# Altium PCB 幻彩灯带.PcbDoc
Units mil, origin at the board's own origin, x right, y up, seen from the top; angles counter-clockwise.
Board outline 3553.37 x 3553.34 mil, 2 copper layers (Top Layer, Bottom Layer); 66 components, 70 nets, 261 pads, 24 vias.
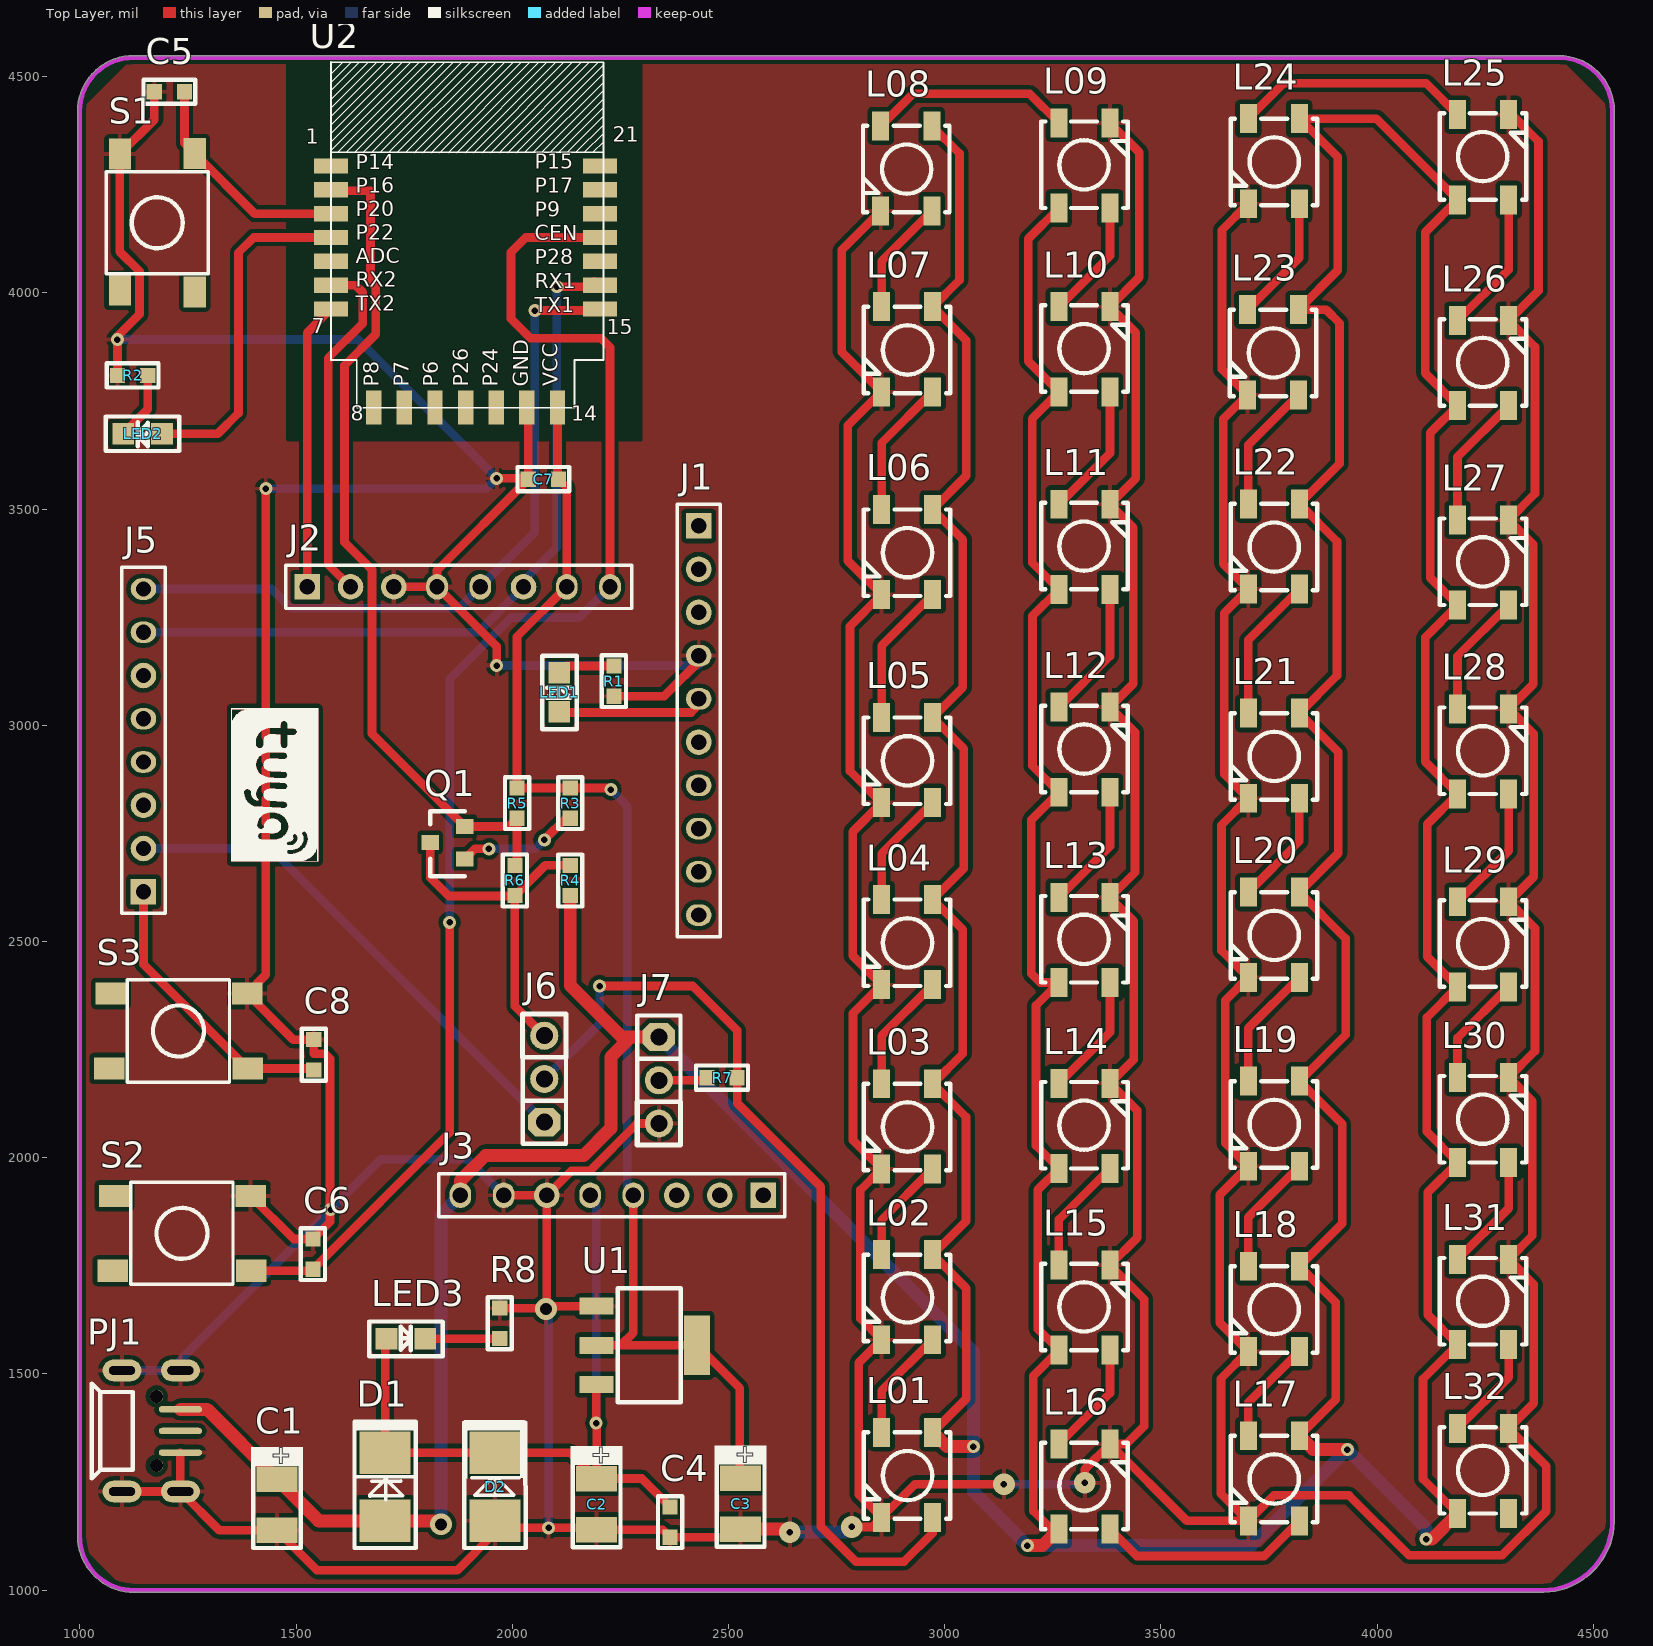
[diagram p0: Top Layer view]
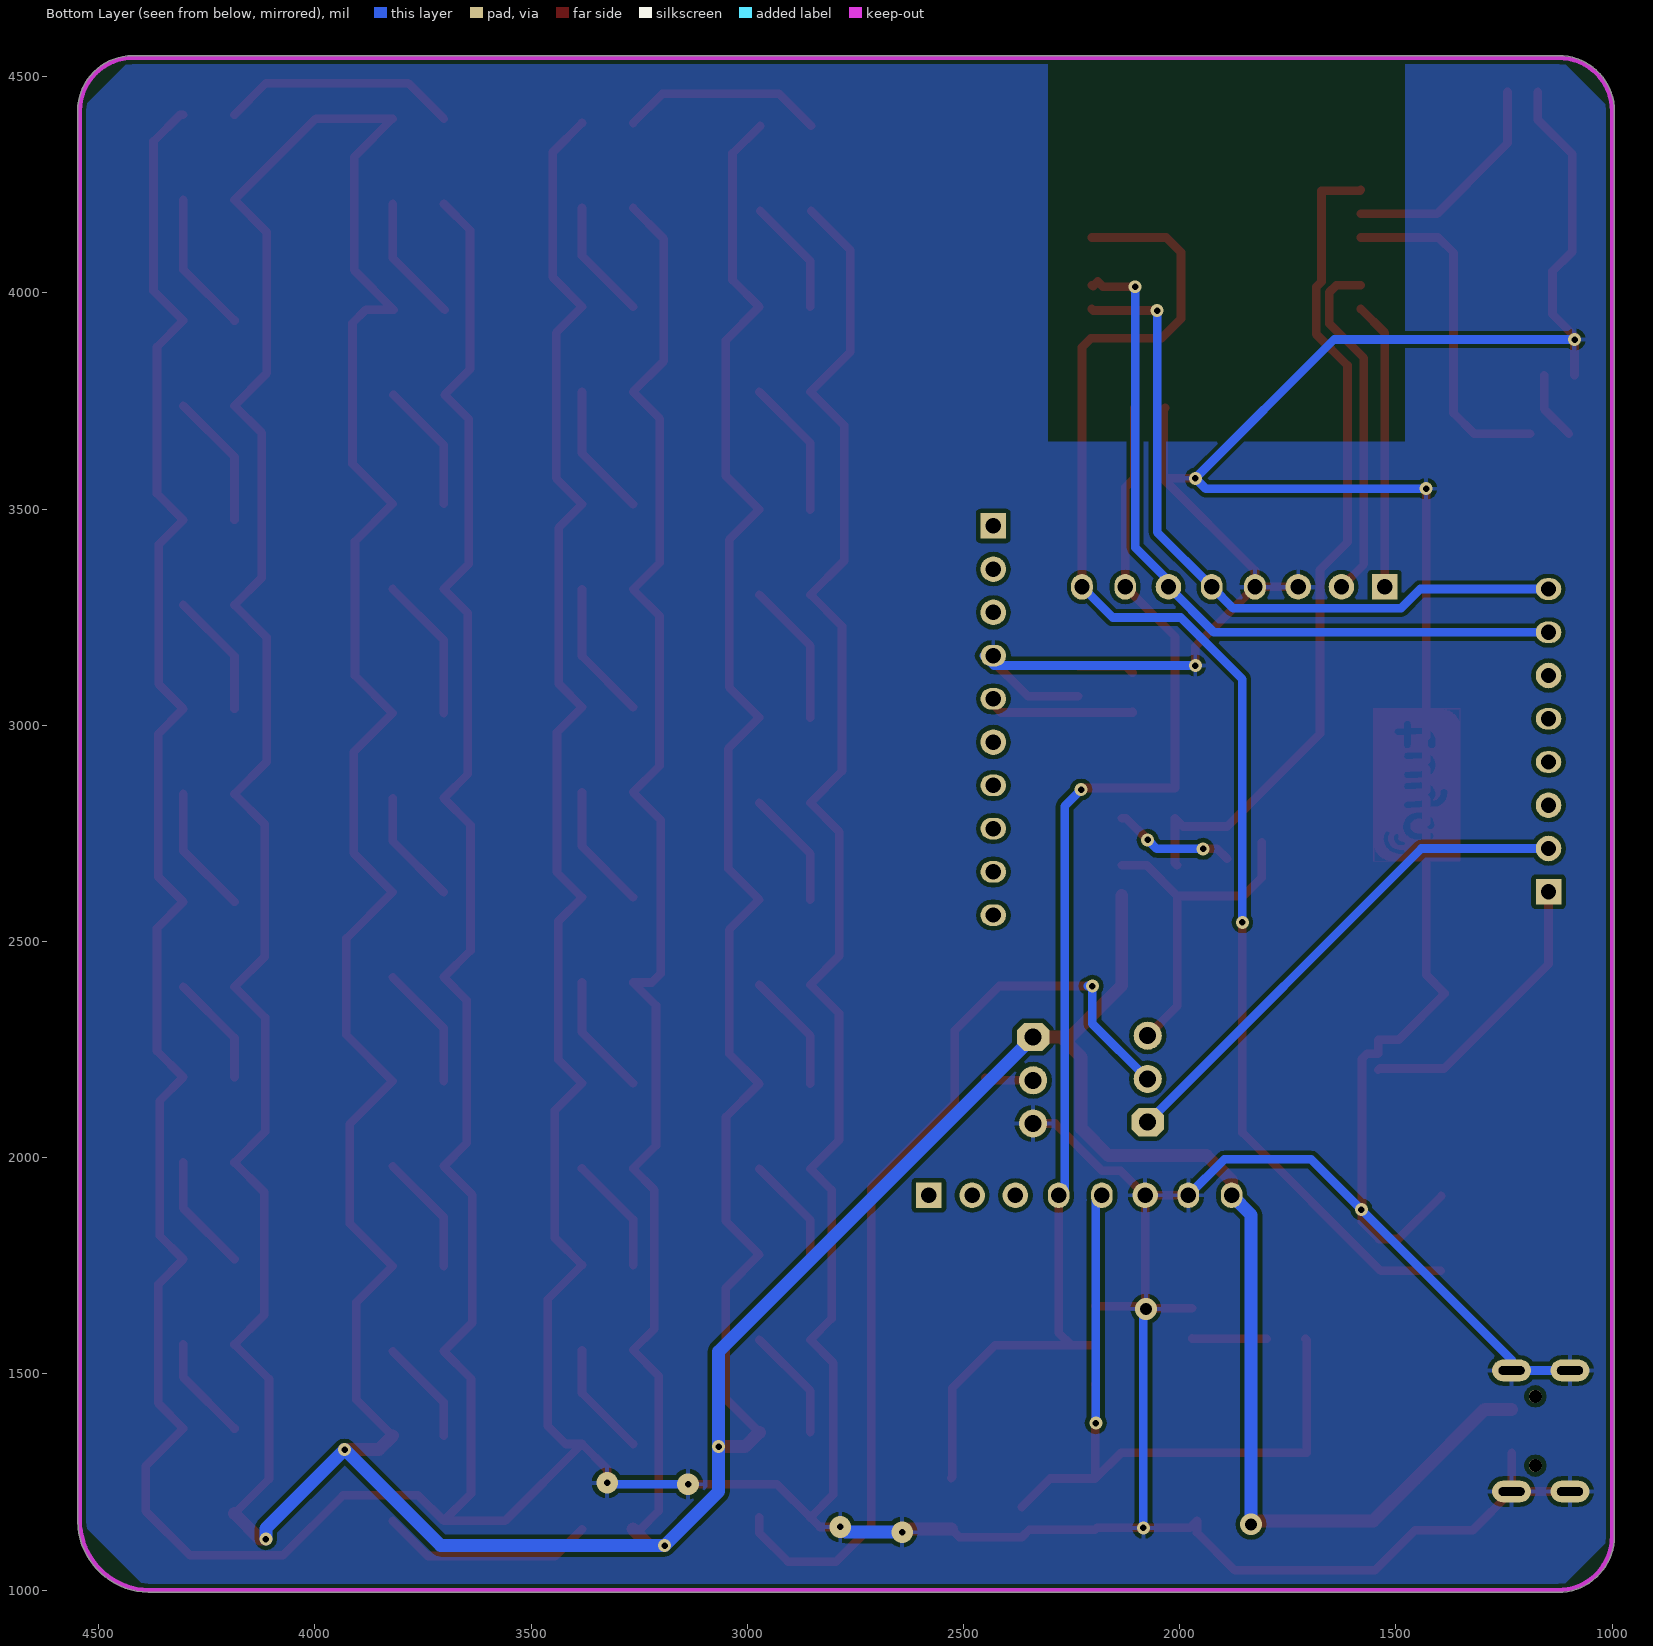
[diagram p1: Bottom Layer view, seen from below]

## Layer stack, top to bottom
Top Solder: solder mask 0.4, Solder Resist, Dk 3.5
Top Layer: signal copper 1.4
Dielectric 1: dielectric 12.6, FR-4, Dk 4.8
Bottom Layer: signal copper 1.4
Bottom Solder: solder mask 0.4, Solder Resist, Dk 3.5

## Board outline
1125,994.99 4384.97,994.99 ccw(c4385,1000) 4385.1,994.99 ccw(c4381.65,1161.65) 4548.32,1158.2 ccw(c4381.65,1161.65) 4548.36,1161.65 ccw(c4381.65,1161.65) 4548.32,1165.05 ccw(c4381.65,1161.65) 4548.32,1165.1 4548.32,1165.05 4548.32,4421.69 ccw(c4543.31,4421.69) 4548.32,4421.73 ccw(c4420.85,4420.85) 4421.73,4548.32 ccw(c4420.85,4420.85) 4419.99,4548.32 1123.31,4548.32 ccw(c1123.31,4420) 994.99,4420 994.99,1125 994.98,1125 cw(c1000,1125) 994.99,1125.03 994.98,1125 ccw(c1125,1125)

## Design rules (kind name [scope] priority, off if disabled: settings)
Clearance [All] p1: gap=10 ignorepadtopadclearanceinfootprint=FALSE except(0: Arc-Hole Track-Hole SMDPad-Hole THPad-Hole Via-Hole Fill-Hole Poly-Hole Region-Hole Text-Hole)
PolygonConnect [All] p1: connectstyle=Relief reliefconductorwidth=10 reliefentries=4 polygonreliefangle="90 Angle" airgapwidth=10
RoutingVias [All] p1: holewidth=28 width=50 viastyle="Through Hole" minholewidth=28 minwidth=50 maxholewidth=28 maxwidth=50
SolderMaskExpansion [All] p1: expansion=4
Width [InNet('WRX')] p1: maxlimit=30 minlimit=10 preferedwidth=20
30 further rules are at their usual default settings.

## Components (designator, comment, footprint, x,y, rotation, side; value= is the part's Value field where it differs from the comment)
C1 "220uF±20%/16V" 钽电容B3528 1456,1197.27 r270 top
C2 "22uF±20%/16V" 钽电容B3528 2195,1199 r270 top
C3 "22uF±20%/16V" 钽电容B3528 2528,1200 r270 top
C4 "0.1uF±20%/50V" C0603 2365,1192.27 r270 top
C5 "0.1uF±20%/16V" C0603 1172,4465 r0 top
C6 "0.1uF±20%/16V" C0603 1539,1742 r90 top
C7 "0.1uF±20%/16V" C0603 2037,3569 r0 top
C8 "0.1uF±20%/16V" C0603 1541,2273 r270 top
D1 "SS210" SMA(DO-214AC) 1706,1239 r90 top
D2 "SMBJ05CA" SMB(DO-214AA) 1960,1239 r90 top
J1 "CON10" HDR1X10Z 2431,3461 r270 top
J2 "CON8" HDR1X8Z 1526,3320 r0 top
J3 "CON8" HDR1X8Z 2580,1913 r180 top
J5 "CON8" HDR1X8Z 1147,2615 r90 top
J6 "KF301-3P" "SIP3 - 2.54" 2074,2082 r90 top
J7 "KF301-3P" "SIP3 - 2.54" 2339,2279 r270 top
L01 "WS2812E" WS2812E 2854,1364.85 r270 top
L02 "WS2812E" WS2812E 2854,1775.85 r270 top
L03 "WS2812E" WS2812E 2854,2171 r270 top
L04 "WS2812E" WS2812E 2854,2596.85 r270 top
L05 "WS2812E" WS2812E 2854,3017.85 r270 top
L06 "WS2812E" WS2812E 2854,3499 r270 top
L07 "WS2812E" WS2812E 2854,3967.85 r270 top
L08 "WS2812E" WS2812E 2851.89,4386 r270 top
L09 "WS2812E" WS2812E 3382.11,4196 r90 top
L10 "WS2812E" WS2812E 3382.11,3771 r90 top
L11 "WS2812E" WS2812E 3382.11,3314.15 r90 top
L12 "WS2812E" WS2812E 3382.11,2845 r90 top
L13 "WS2812E" WS2812E 3382.11,2405 r90 top
L14 "WS2812E" WS2812E 3382.11,1975.15 r90 top
L15 "WS2812E" WS2812E 3382.11,1555 r90 top
L16 "WS2812E" WS2812E 3382.11,1141 r90 top
L17 "WS2812E" WS2812E 3702,1357 r270 top
L18 "WS2812E" WS2812E 3702,1749 r270 top
L19 "WS2812E" WS2812E 3702,2177 r270 top
L20 "WS2812E" WS2812E 3702,2614 r270 top
L21 "WS2812E" WS2812E 3702,3028 r270 top
L22 "WS2812E" WS2812E 3702,3512 r270 top
L23 "WS2812E" WS2812E 3699.89,3961 r270 top
L24 "WS2812E" WS2812E 3702,4402.85 r270 top
L25 "WS2812E" WS2812E 4304,4215 r90 top
L26 "WS2812E" WS2812E 4304,3739 r90 top
L27 "WS2812E" WS2812E 4304,3278 r90 top
L28 "WS2812E" WS2812E 4304,2841 r90 top
L29 "WS2812E" WS2812E 4304,2395 r90 top
L30 "WS2812E" WS2812E 4304,1989 r90 top
L31 "WS2812E" WS2812E 4304,1568 r90 top
L32 "WS2812E" WS2812E 4304,1177 r90 top
LED1 "LED" LED0805_1 2109,3031 r90 top
LED2 "LED" LED0805_1 1190,3674 r180 top
LED3 "LED" LED0805_1 1709,1581 r0 top
PJ1 "MCR_USB" MICRO_USB-NEW-16.12.12 1165,1368 r90 top
Q1 "S8050" SOT-23-NPN 1890,2691 r90 top
R1 "1K±5%" R0603 2235,3067 r90 top
R2 "1K±5%" R0603 1157,3809 r180 top
R3 "2K±5%" R0603 2134,2855 r270 top
R4 "2K±5%" R0603 2134,2606 r90 top
R5 "2K±5%" R0603 2011,2855 r270 top
R6 "NC/0R" R0603 2006,2676 r270 top
R7 "1R±5%" R0603 2520,2185 r180 top
R8 "1R±5%" R0603 1971,1582 r90 top
S1 "KEY_SW2" KEY4-SMD 1179,4162 r270 top
S2 "KEY_SW2" KEY4-SMD 1236,1825 r180 top
S3 "KEY_SW2" KEY4-SMD 1228,2293 r180 top
U1 "GM1117-3.3ST3T" SOT-223 2311,1566 r270 top
U2 "WIFI_BLE_CBU" WIFI_BLE_CBU 1891.98,3734.3 r0 top

## Footprints (in the part's own frame and the unit in brackets; to place one, negate y for a bottom-side part, rotate by r counter-clockwise, add the part's x,y. Pads: shape width x height; smd on the part's side, far side on the other; paste and mask are expansions set on the pad)
C0603 [mil]
  rect 35x35 smd: 1(0,0) 2(70,0)
  silkscreen extent -25,-28 95,28, body extent 4,-16 66,15, height 12
HDR1X8Z [mm]
  rect 1.5x1.5 hole 0.9: 1(0,0)
  round 1.5 hole 0.9: 2(2.54,0) 3(5.08,0) 6(12.7,0)
  oval 1.27x1.5 hole 0.9: 4(7.62,0) 5(10.16,0) 7(15.24,0) 8(17.78,0)
  silkscreen extent -1.27,-1.27 19.05,1.27, body extent -1.27,-1.25 19.05,1.25, height 8.65
HDR1X10Z [mm]
  rect 1.5x1.5 hole 0.9: 1(0,0)
  round 1.5 hole 0.9: 2(2.54,0) 3(5.08,0) 6(12.7,0)
  oval 1.27x1.5 hole 0.9: 4(7.62,0) 5(10.16,0) 7(15.24,0) 8(17.78,0) 9(20.32,0) 10(22.86,0)
  silkscreen extent -1.27,-1.27 24.13,1.27, body extent -1.27,-1.25 24.13,1.25, height 8.65
KEY4-SMD [mm]
  rect 1.8x1.3 smd: 1(-4.035,-2.2) 2(-4.065,2.2) 3(4.065,2.2) 4(3.965,-2.2)
  silkscreen extent -3,-3 3,3
LED0805_1 [mil]
  rect 50x50 smd: 1(0,0) 2(90,0)
  silkscreen extent -40,-40 130,40, body extent 6,-25 84,24, height 30
MICRO_USB-NEW-16.12.12 [mil]
  oval 15x100 smd: 1(-50,-67.5) 3(0,-67.5) 5(50,-67.5)
  oval 0x100 smd: 2(-25,-67.5) 4(25,-67.5)
  oval 50x90 hole 20 slot 60 at 90 deg: 6(-140,-67.5) 7(-140,67.5) 8(140,67.5) 9(140,-67.5)
  round 30 hole 30 unplated: ""(-80,-12.5) ""(80,-12.5)
  silkscreen extent -110,42 110,138, body extent -145,-79 146,158, height 93
R0603 [mil]
  rect 35x35 smd: 1(0,0) 2(70,0)
  silkscreen extent -25,-28 95,28, body extent 2,-16 65,16, height 18
"SIP3 - 2.54" [mil]
  oct 65x75 hole 39.37: 1(0,0)
  round 65 hole 39.37: 2(100,0) 3(200,0)
  silkscreen extent -50,-50 250,50
SMA(DO-214AC) [mm]
  rect 2.5x3 smd: 1(-2,0) 2(2,0)
  silkscreen extent -3.6,-1.84 3.94,1.83, body extent -2.21,-1.38 2.46,1.27, height 2.35
SMB(DO-214AA) [mm]
  rect 2.5x3 smd: 1(-2,0) 2(2,0)
  silkscreen extent -3.6,-1.8 3.91,1.82, body extent -2.28,-1.33 2.39,1.32, height 2.35
SOT-23-NPN [mil]
  rect 35x40 smd: 1(75,0) 2(0,0) 3(38,80)
  silkscreen extent -40,0 110,80, body extent -17,-17 97,80, height 39
SOT-223 [mm]
  rect 1x2 smd: 1(-2.3,-2.95) 2(0,-2.95) 3(2.3,-2.95)
  rect 3.5x1.5 smd: 2(0,2.95)
  silkscreen extent -3.35,-1.71 3.35,1.99, body extent -3.29,-3.55 3.21,3.41, height 1.65
WIFI_BLE_CBU [mm]
  rect 2x0.9 smd: 1(-7.9,14.2) 2(-7.9,12.8) 3(-7.9,11.4) 4(-7.9,10) 5(-7.9,8.6) 6(-7.9,7.2) 7(-7.9,5.8) 15(7.9,5.8) 16(7.9,7.2) 17(7.9,8.6) 18(7.9,10) 19(7.9,11.4) 20(7.9,12.8) 21(7.9,14.2)
  rect 0.9x2 smd: 8(-5.4,0) 9(-3.6,0) 10(-1.8,0) 11(0,0) 12(1.8,0) 13(3.6,0) 14(5.4,0)
  silkscreen extent -7.9,0 8.14,20.33
WS2812E [mm]
  rect 1.7x1 smd: 1(0,3) 2(0,0) 3(5,0) 4(5,3)
  silkscreen extent 0,-1.04 5.08,4.04
钽电容B3528 [mm]
  rect 1.5x2.4 smd: 1(-1.5,0) 2(1.5,0)
  silkscreen extent -3.4,-1.52 2.54,1.52

## Part data
C1 C2 C3: library part "CAPACITOR POL", "Capacitor"
C4 C5 C6 C7 C8: library part CAP, "Capacitor"
D1: library part Diode1, "Diode"
D2: library part "D Schottky", "Schottky Diode", MFR=Toshiba
J1 J2 J3 J5: "Connector"
J6 J7: library part CON3, "Connector"
Q1: library part NPN, "NPN Transistor"
R1 R2 R3 R4 R5 R6 R7 R8: library part RES5
U1: library part GM1117
U2: "Module"

## Via types
v1: diameter 30, hole 15, Top Layer to Bottom Layer, 18 vias
v2: diameter 50, hole 15, Top Layer to Bottom Layer, 4 vias
v3: diameter 50, hole 28, Top Layer to Bottom Layer, 2 vias

## Nets (pads, with @x,y where several pads share a name; then routed paths per layer and width w, separated by ;. In a path a pad name is that pad's centre, name@x,y a point inside that pad or via, vN(x,y) a via of type N, cw(c..) or ccw(c..) an arc to the next point about the centre after c; other vN are vias at no path point)
+3.3V: C3.1 C7.2 J2.7 J3.4 R3.1 R5.1 U1.2 U2.14 | length 3054
  Top Layer w20: U2.14 2104.57,3571.43 C7.2 2126,3550 J2.7 2011,3205 R5.1 R3.1 2224,2855 v1(2228,2851) ; U1.2@2194.86,1566 2251,1566 ; J3.4 2280,1595 2251,1566 ; C3.1 2526,1261.06 2526,1467.14 2427.14,1566 2251,1566
  Bottom Layer w20: v1(2228,2851) 2266,2813 2266,1927 J3.4
+5V: C1.1 D1.1 J3.8 J7.1 L01.1 L02.1 L03.1 L04.1 L05.1 L06.1 L07.1 L08.1 L09.1 L10.1 L11.1 L12.1 L13.1 L14.1 L15.1 L16.1 L17.1 L18.1 L19.1 L20.1 L21.1 L22.1 L23.1 L24.1 L25.1 L26.1 L27.1 L28.1 L29.1 L30.1 L31.1 L32.1 PJ1.5 R4.1 | length 20076.2
  Top Layer w20: v3@1826.74,1160.26 v3(1835,1152) ; L08.1 3034,4322 3034,4029.74 L07.1 3050,3889.96 3050,3576.89 L06.1 3042,3429.11 3042,3087.74 L05.1 3044,2945.96 3044,2668.74 L04.1 3042,2526.96 3042,2240.89 L03.1 3049,2094.11 3049,1852.74 L02.1 3050,1697.96 3050,1442.74 L01.1 ; L16.1 3247,1141 3205,1183 3205,1496 L15.1 3215,1604 3215,1926.15 L14.1 3211,2028.15 3211,2352 L13.1 3221,2405 3200,2426 3200,2781 L12.1 3203,2906 3203,3253.15 L11.1 3202,3376.15 3202,3709 L10.1 3193,3842 3193,4125 L09.1 ; L17.1 3904,1440.89 3904,1665.11 L18.1 3919,1847.89 3919,2078.11 L19.1 3927,2283.89 3927,2507.11 L20.1 3910,2703.89 3910,2938.11 L21.1 3907,3114.89 3907,3425.11 L22.1 3913,3604.89 3913,3930 3882,3961 L23.1 3909,4052 3909,4313.96 L24.1 3998.04,4402.85 L25.1 4111,4140.11 4111,3813.89 L26.1 4123,3676.11 4123,3340.89 L27.1 4111,3203.11 4111,2915.89 L28.1 4116,2771.11 4116,2464.89 L29.1 4115,2324.11 4115,2059.89 L30.1 4117,1920.11 4117,1636.89 L31.1 4106,1488.11 4106,1256.89 L32.1
  Top Layer w30: PJ1.5 1294.32,1418 C1.1 1552.06,1160.26 D1.1 v3@1826.74,1160.26 ; J3.8 1880,1947 1938,2005 2165,2005 2228,2068 2228,2233 2274,2279 ; R4.1 2134,2398 2253,2279 2274,2279 ; J7.1 2274,2279 ; L01.1 3004.96,1332 v1(3066,1332) ; v1(3191,1103) 3226,1103 L16.1 ; L17.1 3852.11,1325 v1(3931,1325) ; v1(4113,1118) 4126.89,1118 L32.1
  Bottom Layer w30: v3(1835,1152) 1835,1868 J3.8 ; J7.1 3066,1552 v1(3066,1332) 3066,1228 v1(3191,1103) 3709,1103 v1(3931,1325) 4113,1143 v1(4113,1118)
+5VF: C2.1 C4.1 D1.2 D2.2 J3.5 LED3.1 U1.3 | length 1726.6
  Top Layer w20: LED3.1 1706,1578 D1.2 D2.2 2135.32,1317.74 C2.1 ; U1.3@2195,1475.31 U1.3 2194,1474.59 v1(2194,1386) 2195,1385 C2.1 ; C4.1 2299.21,1258.06 C2.1
  Bottom Layer w20: J3.5 2194,1899 v1(2194,1386)
ADC: U2.5
GND: C1.2 C2.2 C3.2 C4.2 C5.1 C6.2 C7.1 C8.1 D2.1 J1.4 J2.3 J2.4 J3.6 J3.7 J7.3 L01.3 L02.3 L03.3 L04.3 L05.3 L06.3 L07.3 L08.3 L09.3 L10.3 L11.3 L12.3 L13.3 L14.3 L15.3 L16.3 L17.3 L18.3 L19.3 L20.3 L21.3 L22.3 L23.3 L24.3 L25.3 L26.3 L27.3 L28.3 L29.3 L30.3 L31.3 L32.3 PJ1.1 PJ1.6 PJ1.7 PJ1.8 PJ1.9 R1.1 R2.2 R8.2 S1.1 S2.1 S3.1 U1.1 U2.13 | length 84195.4
  Top Layer w1: 1351,2685 1351,3039 ; 1352,2687 1352,3003 ; 1352,3038 1352,3039 ; 1353,2685 1353,3007 ; 1353,3037 1353,3039 ; 1354,2685 1354,3010 ; 1354,3037 1354,3039 ; 1355,2685 1355,3012 ; 1355,3037 1355,3039 ; 1356,2685 1356,3014 ; 1356,3037 1356,3039 ; 1357,2685 1357,3016 ; 1357,3037 1357,3039 ; 1358,2685 1358,3017 ; 1358,3037 1358,3039 ; 1359,2685 1359,3019 ; 1359,3037 1359,3039 ; 1360,2685 1360,3020 ; 1360,3037 1360,3039 ; 1361,2685 1361,3021 ; 1361,3037 1361,3039 ; 1362,2685 1362,3023 ; 1362,3037 1362,3039 ; 1363,2685 1363,3024 ; 1363,3037 1363,3039 ; 1364,2685 1364,3025 ; 1364,3037 1364,3039 ; 1365,2685 1365,3026 ; 1365,3037 1365,3039 ; 1366,2685 1366,3026 ; 1366,3037 1366,3039 ; 1367,2685 1367,3027 ; 1367,3037 1367,3039 ; 1368,2685 1368,3028 ; 1368,3037 1368,3039 ; 1369,2685 1369,3029 ; 1369,3037 1369,3039 ; 1370,2685 1370,3029 ; 1370,3037 1370,3039 ; 1371,2685 1371,3030 ; 1371,3037 1371,3039 ; 1372,2685 1372,3031 ; 1372,3037 1372,3039 ; 1373,2685 1373,3031 ; 1373,3037 1373,3039 ; 1374,2685 1374,3032 ; 1374,3037 1374,3039 ; 1375,2685 1375,3032 ; 1375,3037 1375,3039 ; 1376,2685 1376,3033 ; 1376,3037 1376,3039 ; 1377,2685 1377,3033 ; 1377,3037 1377,3039 ; 1378,2685 1378,3034 ; 1378,3037 1378,3039 ; 1379,2685 1379,3034 ; 1379,3037 1379,3039 ; 1380,2685 1380,2840 ; 1380,2848 1380,3034 ; 1380,3037 1380,3039 ; 1381,2685 1381,2835 ; 1381,2850 1381,3035 ; 1381,3037 1381,3039 ; 1382,2685 1382,2832 ; 1382,2851 1382,3035 ; 1382,3037 1382,3039 ; 1383,2685 1383,2830 ; 1383,2851 1383,3036 ; 1383,3037 1383,3039 ; 1384,2685 1384,2828 ; 1384,2852 1384,3036 ; 1384,3037 1384,3039 ; 1385,2685 1385,2826 ; 1385,2852 1385,3036 ; 1385,3037 1385,3039 ; 1386,2685 1386,2825 ; 1386,2853 1386,3036 ; 1386,3038 1386,3039 ; 1387,2685 1387,2823 ; 1387,2853 1387,3036 ; 1387,3038 1387,3039 ; 1388,2685 1388,2822 ; 1388,2853 1388,3037 ; 1388,3038 1388,3039 ; 1389,2685 1389,2821 ; 1389,2853 1389,3037 ; 1389,3038 1389,3039 ; 1390,2685 1390,2820 ; 1390,2853 1390,3037 ; 1390,3038 1390,3039 ; 1391,2685 1391,2819 ; 1391,2852 1391,3037 ; 1391,3038 1391,3039 ; 1392,2685 1392,2818 ; 1392,2852 1392,3039 ; 1393,2685 1393,2818 ; 1393,2852 1393,3039 ; 1394,2685 1394,2817 ; 1394,2851 1394,3039 ; 1395,2685 1395,2816 ; 1395,2850 1395,3039 ; 1396,2685 1396,2815 ; 1396,2849 1396,3039 ; 1397,2685 1397,2815 ; 1397,2847 1397,3039 ; 1398,2685 1398,2814 ; 1398,2839 1398,3039 ; 1399,2685 1399,2814 ; 1399,2836 1399,3039 ; 1400,2685 1400,2814 ; 1400,2834 1400,3039 ; 1401,2685 1401,2813 ; 1401,2833 1401,3039 ; 1402,2685 1402,2813 ; 1402,2831 1402,3039 ; 1403,2685 1403,2812 ; 1403,2830 1403,3039 ; 1404,2685 1404,2812 ; 1404,2830 1404,3039 ; 1405,2685 1405,2812 ; 1405,2829 1405,3039 ; 1406,2685 1406,2812 ; 1406,2828 1406,3039 ; 1407,2685 1407,2811 ; 1407,2828 1407,3039 ; 1408,2685 1408,2811 ; 1408,2828 1408,2837 ; 1408,2845 1408,2904 ; 1408,2913 1408,2951 ; 1408,2970 1408,3039 ; 1409,2685 1409,2811 ; 1409,2827 1409,2833 ; 1409,2849 1409,2899 ; 1409,2918 1409,2950 ; 1409,2973 1409,3039 ; 1410,2685 1410,2767 ; 1410,2771 1410,2811 ; 1410,2827 1410,2831 ; 1410,2852 1410,2897 ; 1410,2921 1410,2949 ; 1410,2976 1410,3039 ; 1411,2685 1411,2764 ; 1411,2776 1411,2811 ; 1411,2827 1411,2830 ; 1411,2853 1411,2895 ; 1411,2923 1411,2948 ; 1411,2977 1411,3039 ; 1412,2685 1412,2741 ; 1412,2746 1412,2763 ; 1412,2779 1412,2811 ; 1412,2827 1412,2829 ; 1412,2855 1412,2893 ; 1412,2924 1412,2947 ; 1412,2979 1412,3039 ; 1413,2685 1413,2739 ; 1413,2748 1413,2762 ; 1413,2781 1413,2811 ; 1413,2857 1413,2891 ; 1413,2926 1413,2947 ; 1413,2981 1413,3039 ; 1414,2685 1414,2738 ; 1414,2749 1414,2761 ; 1414,2783 1414,2811 ; 1414,2858 1414,2890 ; 1414,2927 1414,2947 ; 1414,2982 1414,3039 ; 1415,2685 1415,2737 ; 1415,2750 1415,2761 ; 1415,2785 1415,2811 ; 1415,2859 1415,2889 ; 1415,2928 1415,2947 ; 1415,2983 1415,3039 ; 1416,2685 1416,2736 ; 1416,2750 1416,2761 ; 1416,2786 1416,2811 ; 1416,2860 1416,2888 ; 1416,2929 1416,2947 ; 1416,2984 1416,3039 ; 1417,2685 1417,2736 ; 1417,2751 1417,2760 ; 1417,2787 1417,2811 ; 1417,2860 1417,2887 ; 1417,2930 1417,2947 ; 1417,2985 1417,3039 ; 1418,2685 1418,2736 ; 1418,2751 1418,2760 ; 1418,2788 1418,2811 ; 1418,2861 1418,2887 ; 1418,2931 1418,2947 ; 1418,2986 1418,3039 ; 1419,2685 1419,2735 ; 1419,2751 1419,2760 ; 1419,2790 1419,2811 ; 1419,2862 1419,2886 ; 1419,2931 1419,2947 ; 1419,2987 1419,3039 ; 1420,2685 1420,2735 ; 1420,2751 1420,2760 ; 1420,2790 1420,2811 ; 1420,2863 1420,2885 ; 1420,2932 1420,2947 ; 1420,2987 1420,3039 ; 1421,2685 1421,2735 ; 1421,2751 1421,2760 ; 1421,2791 1421,2811 ; 1421,2863 1421,2884 ; 1421,2933 1421,2947 ; 1421,2988 1421,3039 ; 1422,2685 1422,2735 ; 1422,2751 1422,2760 ; 1422,2792 1422,2811 ; 1422,2864 1422,2884 ; 1422,2933 1422,2948 ; 1422,2989 1422,3039 ; 1423,2685 1423,2735 ; 1423,2751 1423,2761 ; 1423,2793 1423,2811 ; 1423,2864 1423,2884 ; 1423,2934 1423,2949 ; 1423,2989 1423,3039 ; 1424,2685 1424,2735 ; 1424,2751 1424,2761 ; 1424,2794 1424,2810 ; 1424,2865 1424,2883 ; 1424,2934 1424,2950 ; 1424,2990 1424,3039 ; 1425,2685 1425,2735 ; 1425,2751 1425,2762 ; 1425,2794 1425,2810 ; 1425,2865 1425,2883 ; 1425,2935 1425,2953 ; 1425,2990 1425,3039 ; 1426,2685 1426,2735 ; 1426,2751 1426,2763 ; 1426,2795 1426,2810 ; 1426,2836 1426,2843 ; 1426,2866 1426,2882 ; 1426,2905 1426,2912 ; 1426,2935 1426,2968 ; 1426,2991 1426,3039 ; 1427,2685 1427,2735 ; 1427,2751 1427,2765 ; 1427,2795 1427,2810 ; 1427,2834 1427,2846 ; 1427,2866 1427,2882 ; 1427,2903 1427,2915 ; 1427,2935 1427,2970 ; 1427,2991 1427,3039 ; 1428,2685 1428,2735 ; 1428,2751 1428,2771 ; 1428,2796 1428,2810 ; 1428,2832 1428,2847 ; 1428,2866 1428,2881 ; 1428,2901 1428,2916 ; 1428,2936 1428,2972 ; 1428,2992 1428,3039 ; 1429,2685 1429,2735 ; 1429,2751 1429,2774 ; 1429,2796 1429,2810 ; 1429,2831 1429,2848 ; 1429,2867 1429,2881 ; 1429,2900 1429,2917 ; 1429,2936 1429,2973 ; 1429,2992 1429,3039 ; 1430,2685 1430,2735 ; 1430,2751 1430,2775 ; 1430,2797 1430,2810 ; 1430,2830 1430,2849 ; 1430,2867 1430,2881 ; 1430,2899 1430,2918 ; 1430,2936 1430,2974 ; 1430,2992 1430,3039 ; 1431,2685 1431,2735 ; 1431,2751 1431,2777 ; 1431,2797 1431,2810 ; 1431,2829 1431,2850 ; 1431,2867 1431,2881 ; 1431,2898 1431,2919 ; 1431,2936 1431,2975 ; 1431,2993 1431,3039 ; 1432,2685 1432,2735 ; 1432,2751 1432,2778 ; 1432,2797 1432,2810 ; 1432,2829 1432,2851 ; 1432,2867 1432,2880 ; 1432,2898 1432,2920 ; 1432,2937 1432,2975 ; 1432,2993 1432,3039 ; 1433,2685 1433,2735 ; 1433,2751 1433,2779 ; 1433,2798 1433,2810 ; 1433,2828 1433,2851 ; 1433,2868 1433,2880 ; 1433,2897 1433,2920 ; 1433,2937 1433,2976 ; 1433,2993 1433,3039 ; 1434,2685 1434,2735 ; 1434,2751 1434,2780 ; 1434,2798 1434,2810 ; 1434,2827 1434,2851 ; 1434,2868 1434,2880 ; 1434,2896 1434,2920 ; 1434,2937 1434,2977 ; 1434,2993 1434,3039 ; 1435,2685 1435,2735 ; 1435,2751 1435,2781 ; 1435,2798 1435,2810 ; 1435,2827 1435,2852 ; 1435,2868 1435,2880 ; 1435,2896 1435,2921 ; 1435,2937 1435,2977 ; 1435,2994 1435,3039 ; 1436,2685 1436,2735 ; 1436,2751 1436,2781 ; 1436,2798 1436,2810 ; 1436,2827 1436,2852 ; 1436,2868 1436,2879 ; 1436,2896 1436,2921 ; 1436,2937 1436,2977 ; 1436,2994 1436,3039 ; 1437,2685 1437,2735 ; 1437,2751 1437,2782 ; 1437,2799 1437,2810 ; 1437,2826 1437,2852 ; 1437,2868 1437,2879 ; 1437,2895 1437,2921 ; 1437,2937 1437,2978 ; 1437,2994 1437,3039 ; 1438,2685 1438,2735 ; 1438,2751 1438,2782 ; 1438,2799 1438,2810 ; 1438,2826 1438,2852 ; 1438,2868 1438,2879 ; 1438,2895 1438,2921 ; 1438,2937 1438,2978 ; 1438,2994 1438,3039 ; 1439,2685 1439,2735 ; 1439,2751 1439,2783 ; 1439,2799 1439,2810 ; 1439,2826 1439,2853 ; 1439,2868 1439,2879 ; 1439,2895 1439,2922 ; 1439,2938 1439,2978 ; 1439,2994 1439,3039 ; 1440,2685 1440,2735 ; 1440,2750 1440,2783 ; 1440,2799 1440,2810 ; 1440,2826 1440,2853 ; 1440,2868 1440,2879 ; 1440,2895 1440,2922 ; 1440,2938 1440,2979 ; 1440,2994 1440,3039 ; 1441,2685 1441,2735 ; 1441,2750 1441,2783 ; 1441,2799 1441,2810 ; 1441,2825 1441,2853 ; 1441,2869 1441,2879 ; 1441,2895 1441,2922 ; 1441,2938 1441,2979 ; 1441,2994 1441,3039 ; 1442,2685 1442,2735 ; 1442,2750 1442,2783 ; 1442,2799 1442,2810 ; 1442,2825 1442,2853 ; 1442,2869 1442,2879 ; 1442,2894 1442,2922 ; 1442,2938 1442,2979 ; 1442,2994 1442,3039 ; 1443,2685 1443,2735 ; 1443,2750 1443,2784 ; 1443,2799 1443,2810 ; 1443,2825 1443,2853 ; 1443,2869 1443,2879 ; 1443,2894 1443,2922 ; 1443,2938 1443,2979 ; 1443,2994 1443,3039 ; 1444,2685 1444,2735 ; 1444,2750 1444,2784 ; 1444,2799 1444,2810 ; 1444,2825 1444,2853 ; 1444,2868 1444,2879 ; 1444,2894 1444,2922 ; 1444,2938 1444,2979 ; 1444,2994 1444,3039 ; 1445,2685 1445,2735 ; 1445,2750 1445,2784 ; 1445,2799 1445,2809 ; 1445,2825 1445,2853 ; 1445,2868 1445,2879 ; 1445,2894 1445,2922 ; 1445,2938 1445,2979 ; 1445,2994 1445,3039 ; 1446,2685 1446,2735 ; 1446,2750 1446,2784 ; 1446,2799 1446,2809 ; 1446,2825 1446,2853 ; 1446,2868 1446,2879 ; 1446,2894 1446,2922 ; 1446,2938 1446,2979 ; 1446,2994 1446,3039 ; 1447,2685 1447,2735 ; 1447,2750 1447,2784 ; 1447,2799 1447,2809 ; 1447,2825 1447,2853 ; 1447,2868 1447,2879 ; 1447,2894 1447,2922 ; 1447,2938 1447,2979 ; 1447,2994 1447,3039 ; 1448,2685 1448,2735 ; 1448,2750 1448,2784 ; 1448,2799 1448,2809 ; 1448,2825 1448,2853 ; 1448,2868 1448,2879 ; 1448,2894 1448,2922 ; 1448,2937 1448,2979 ; 1448,2994 1448,3039 ; 1449,2685 1449,2735 ; 1449,2750 1449,2784 ; 1449,2799 1449,2809 ; 1449,2825 1449,2853 ; 1449,2868 1449,2878 ; 1449,2894 1449,2922 ; 1449,2937 1449,2979 ; 1449,2994 1449,3039 ; 1450,2685 1450,2735 ; 1450,2750 1450,2783 ; 1450,2799 1450,2809 ; 1450,2825 1450,2853 ; 1450,2868 1450,2878 ; 1450,2894 1450,2922 ; 1450,2937 1450,2979 ; 1450,2994 1450,3039 ; 1451,2685 1451,2735 ; 1451,2751 1451,2783 ; 1451,2799 1451,2809 ; 1451,2825 1451,2853 ; 1451,2868 1451,2878 ; 1451,2894 1451,2922 ; 1451,2937 1451,2979 ; 1451,2994 1451,3039 ; 1452,2685 1452,2735 ; 1452,2751 1452,2783 ; 1452,2799 1452,2809 ; 1452,2825 1452,2853 ; 1452,2868 1452,2878 ; 1452,2894 1452,2922 ; 1452,2937 1452,2979 ; 1452,2994 1452,3039 ; 1453,2685 1453,2735 ; 1453,2751 1453,2783 ; 1453,2799 1453,2809 ; 1453,2825 1453,2852 ; 1453,2868 1453,2878 ; 1453,2894 1453,2922 ; 1453,2937 1453,2978 ; 1453,2994 1453,3039 ; 1454,2685 1454,2735 ; 1454,2751 1454,2782 ; 1454,2798 1454,2809 ; 1454,2825 1454,2852 ; 1454,2868 1454,2878 ; 1454,2894 1454,2922 ; 1454,2937 1454,2978 ; 1454,2994 1454,3039 ; 1455,2685 1455,2735 ; 1455,2752 1455,2782 ; 1455,2798 1455,2809 ; 1455,2825 1455,2852 ; 1455,2868 1455,2878 ; 1455,2894 1455,2922 ; 1455,2937 1455,2978 ; 1455,2994 1455,3039 ; 1456,2685 1456,2735 ; 1456,2752 1456,2781 ; 1456,2798 1456,2809 ; 1456,2825 1456,2852 ; 1456,2868 1456,2878 ; 1456,2894 1456,2922 ; 1456,2937 1456,2978 ; 1456,2994 1456,3039 ; 1457,2685 1457,2735 ; 1457,2753 1457,2781 ; 1457,2798 1457,2809 ; 1457,2824 1457,2852 ; 1457,2868 1457,2878 ; 1457,2894 1457,2922 ; 1457,2937 1457,2978 ; 1457,2994 1457,3039 ; 1458,2685 1458,2736 ; 1458,2753 1458,2780 ; 1458,2797 1458,2809 ; 1458,2824 1458,2852 ; 1458,2868 1458,2878 ; 1458,2894 1458,2922 ; 1458,2937 1458,2978 ; 1458,2994 1458,3039 ; 1459,2685 1459,2736 ; 1459,2754 1459,2779 ; 1459,2797 1459,2809 ; 1459,2824 1459,2852 ; 1459,2868 1459,2878 ; 1459,2894 1459,2922 ; 1459,2937 1459,2978 ; 1459,2994 1459,3039 ; 1460,2685 1460,2736 ; 1460,2755 1460,2778 ; 1460,2797 1460,2809 ; 1460,2824 1460,2852 ; 1460,2868 1460,2878 ; 1460,2894 1460,2921 ; 1460,2937 1460,2978 ; 1460,2994 1460,3039 ; 1461,2685 1461,2737 ; 1461,2756 1461,2777 ; 1461,2796 1461,2809 ; 1461,2824 1461,2852 ; 1461,2868 1461,2878 ; 1461,2894 1461,2921 ; 1461,2937 1461,2978 ; 1461,2994 1461,3039 ; 1462,2685 1462,2737 ; 1462,2757 1462,2776 ; 1462,2796 1462,2809 ; 1462,2824 1462,2852 ; 1462,2868 1462,2878 ; 1462,2894 1462,2921 ; 1462,2937 1462,2978 ; 1462,2994 1462,3039 ; 1463,2685 1463,2737 ; 1463,2758 1463,2775 ; 1463,2795 1463,2809 ; 1463,2824 1463,2852 ; 1463,2868 1463,2878 ; 1463,2894 1463,2921 ; 1463,2937 1463,2978 ; 1463,2994 1463,3039 ; 1464,2685 1464,2738 ; 1464,2760 1464,2773 ; 1464,2795 1464,2809 ; 1464,2824 1464,2852 ; 1464,2867 1464,2878 ; 1464,2894 1464,2921 ; 1464,2937 1464,2955 ; 1464,3002 1464,3039 ; 1465,2685 1465,2738 ; 1465,2762 1465,2770 ; 1465,2794 1465,2808 ; 1465,2824 1465,2852 ; 1465,2867 1465,2878 ; 1465,2894 1465,2921 ; 1465,2937 1465,2951 ; 1465,3006 1465,3039 ; 1466,2685 1466,2739 ; 1466,2794 1466,2808 ; 1466,2824 1466,2852 ; 1466,2867 1466,2878 ; 1466,2894 1466,2921 ; 1466,2937 1466,2950 ; 1466,3007 1466,3039 ; 1467,2685 1467,2739 ; 1467,2793 1467,2808 ; 1467,2824 1467,2852 ; 1467,2867 1467,2878 ; 1467,2893 1467,2921 ; 1467,2937 1467,2949 ; 1467,3008 1467,3039 ; 1468,2685 1468,2740 ; 1468,2793 1468,2808 ; 1468,2824 1468,2852 ; 1468,2867 1468,2878 ; 1468,2893 1468,2921 ; 1468,2937 1468,2948 ; 1468,3009 1468,3039 ; 1469,2685 1469,2741 ; 1469,2792 1469,2808 ; 1469,2824 1469,2852 ; 1469,2867 1469,2878 ; 1469,2893 1469,2921 ; 1469,2937 1469,2947 ; 1469,3009 1469,3039 ; 1470,2685 1470,2741 ; 1470,2791 1470,2808 ; 1470,2824 1470,2852 ; 1470,2867 1470,2878 ; 1470,2893 1470,2921 ; 1470,2937 1470,2947 ; 1470,3010 1470,3039 ; 1471,2685 1471,2742 ; 1471,2790 1471,2808 ; 1471,2824 1471,2852 ; 1471,2867 1471,2878 ; 1471,2893 1471,2921 ; 1471,2937 1471,2947 ; 1471,3010 1471,3039 ; 1472,2685 1472,2743 ; 1472,2790 1472,2808 ; 1472,2824 1472,2851 ; 1472,2867 1472,2878 ; 1472,2893 1472,2921 ; 1472,2937 1472,2947 ; 1472,3010 1472,3039 ; 1473,2685 1473,2744 ; 1473,2789 1473,2808 ; 1473,2824 1473,2851 ; 1473,2867 1473,2878 ; 1473,2893 1473,2921 ; 1473,2937 1473,2947 ; 1473,3010 1473,3039 ; 1474,2685 1474,2745 ; 1474,2788 1474,2808 ; 1474,2823 1474,2852 ; 1474,2867 1474,2878 ; 1474,2893 1474,2921 ; 1474,2937 1474,2947 ; 1474,3010 1474,3039 ; 1475,2685 1475,2745 ; 1475,2787 1475,2808 ; 1475,2823 1475,2852 ; 1475,2867 1475,2878 ; 1475,2893 1475,2921 ; 1475,2936 1475,2947 ; 1475,3010 1475,3039 ; 1476,2685 1476,2747 ; 1476,2785 1476,2809 ; 1476,2823 1476,2852 ; 1476,2866 1476,2878 ; 1476,2893 1476,2922 ; 1476,2936 1476,2947 ; 1476,3009 1476,3039 ; 1477,2685 1477,2748 ; 1477,2784 1477,2809 ; 1477,2822 1477,2852 ; 1477,2866 1477,2879 ; 1477,2892 1477,2922 ; 1477,2936 1477,2947 ; 1477,3009 1477,3039 ; 1478,2685 1478,2726 ; 1478,2728 1478,2749 ; 1478,2783 1478,2810 ; 1478,2822 1478,2853 ; 1478,2865 1478,2879 ; 1478,2891 1478,2923 ; 1478,2935 1478,2948 ; 1478,3008 1478,3039 ; 1479,2685 1479,2705 ; 1479,2709 1479,2724 ; 1479,2730 1479,2751 ; 1479,2781 1479,2811 ; 1479,2821 1479,2854 ; 1479,2864 1479,2880 ; 1479,2890 1479,2924 ; 1479,2934 1479,2948 ; 1479,3008 1479,3039 ; 1480,2685 1480,2704 ; 1480,2711 1480,2723 ; 1480,2731 1480,2752 ; 1480,2779 1480,2812 ; 1480,2820 1480,2855 ; 1480,2863 1480,2881 ; 1480,2889 1480,2925 ; 1480,2933 1480,2949 ; 1480,3007 1480,3039 ; 1481,2685 1481,2703 ; 1481,2712 1481,2722 ; 1481,2731 1481,2754 ; 1481,2777 1481,2814 ; 1481,2817 1481,2857 ; 1481,2860 1481,2884 ; 1481,2887 1481,2927 ; 1481,2930 1481,2951 ; 1481,3005 1481,3039 ; 1482,2685 1482,2703 ; 1482,2712 1482,2722 ; 1482,2731 1482,2757 ; 1482,2774 1482,2977 ; 1482,2993 1482,3039 ; 1483,2685 1483,2702 ; 1483,2712 1483,2722 ; 1483,2732 1483,2761 ; 1483,2770 1483,2977 ; 1483,2993 1483,3039 ; 1484,2685 1484,2702 ; 1484,2712 1484,2722 ; 1484,2732 1484,2977 ; 1484,2993 1484,3039 ; 1485,2685 1485,2702 ; 1485,2712 1485,2722 ; 1485,2732 1485,2977 ; 1485,2993 1485,3039 ; 1486,2685 1486,2702 ; 1486,2712 1486,2722 ; 1486,2732 1486,2977 ; 1486,2993 1486,3039 ; 1487,2685 1487,2702 ; 1487,2712 1487,2722 ; 1487,2732 1487,2977 ; 1487,2993 1487,3039 ; 1488,2685 1488,2702 ; 1488,2712 1488,2722 ; 1488,2732 1488,2977 ; 1488,2993 1488,3039 ; 1489,2685 1489,2702 ; 1489,2712 1489,2722 ; 1489,2733 1489,2977 ; 1489,2993 1489,3039 ; 1490,2685 1490,2702 ; 1490,2712 1490,2722 ; 1490,2733 1490,2977 ; 1490,2993 1490,3039 ; 1491,2685 1491,2702 ; 1491,2712 1491,2722 ; 1491,2734 1491,2977 ; 1491,2993 1491,3039 ; 1492,2685 1492,2702 ; 1492,2712 1492,2723 ; 1492,2735 1492,2743 ; 1492,2745 1492,2977 ; 1492,2993 1492,3039 ; 1493,2685 1493,2702 ; 1493,2713 1493,2723 ; 1493,2737 1493,2740 ; 1493,2747 1493,2977 ; 1493,2993 1493,3039 ; 1494,2685 1494,2702 ; 1494,2713 1494,2723 ; 1494,2748 1494,2977 ; 1494,2993 1494,3039 ; 1495,2685 1495,2703 ; 1495,2713 1495,2724 ; 1495,2748 1495,2977 ; 1495,2993 1495,3039 ; 1496,2685 1496,2703 ; 1496,2713 1496,2724 ; 1496,2749 1496,2977 ; 1496,2993 1496,3039 ; 1497,2685 1497,2703 ; 1497,2713 1497,2725 ; 1497,2749 1497,2977 ; 1497,2992 1497,3039 ; 1498,2685 1498,2703 ; 1498,2714 1498,2726 ; 1498,2749 1498,2978 ; 1498,2992 1498,3039 ; 1499,2685 1499,2703 ; 1499,2714 1499,2727 ; 1499,2749 1499,2978 ; 1499,2992 1499,3039 ; 1500,2685 1500,2704 ; 1500,2714 1500,2728 ; 1500,2748 1500,2979 ; 1500,2991 1500,3039 ; 1501,2685 1501,2704 ; 1501,2715 1501,2729 ; 1501,2748 1501,2980 ; 1501,2990 1501,3039 ; 1502,2685 1502,2704 ; 1502,2715 1502,2730 ; 1502,2747 1502,2981 ; 1502,2989 1502,3039 ; 1503,2685 1503,2705 ; 1503,2716 1503,2732 ; 1503,2746 1503,2983 ; 1503,2987 1503,3039 ; 1504,2685 1504,2705 ; 1504,2716 1504,2734 ; 1504,2743 1504,3039 ; 1505,2685 1505,2705 ; 1505,2717 1505,3039 ; 1506,2685 1506,2706 ; 1506,2718 1506,3039 ; 1507,2685 1507,2706 ; 1507,2718 1507,3039 ; 1508,2685 1508,2707 ; 1508,2719 1508,3039 ; 1509,2685 1509,2707 ; 1509,2720 1509,3039 ; 1510,2685 1510,2708 ; 1510,2721 1510,3039 ; 1511,2686 1511,2708 ; 1511,2722 1511,3039 ; 1512,2686 1512,2709 ; 1512,2723 1512,3039 ; 1513,2685 1513,2710 ; 1513,2725 1513,3039 ; 1514,2685 1514,2686 ; 1514,2687 1514,2710 ; 1514,2727 1514,2748 ; 1514,2752 1514,3039 ; 1515,2685 1515,2686 ; 1515,2687 1515,2711 ; 1515,2729 1515,2746 ; 1515,2753 1515,3039 ; 1516,2685 1516,2686 ; 1516,2687 1516,2712 ; 1516,2732 1516,2743 ; 1516,2754 1516,3039 ; 1517,2685 1517,2686 ; 1517,2687 1517,2713 ; 1517,2754 1517,3039 ; 1518,2685 1518,2686 ; 1518,2688 1518,2714 ; 1518,2755 1518,3039 ; 1519,2685 1519,2686 ; 1519,2688 1519,2715 ; 1519,2755 1519,3039 ; 1520,2685 1520,2686 ; 1520,2688 1520,2716 ; 1520,2755 1520,3039 ; 1521,2685 1521,2686 ; 1521,2688 1521,2717 ; 1521,2755 1521,3039 ; 1522,2685 1522,2686 ; 1522,2689 1522,2718 ; 1522,2754 1522,3039 ; 1523,2685 1523,2686 ; 1523,2689 1523,2720 ; 1523,2754 1523,3039 ; 1524,2685 1524,2686 ; 1524,2690 1524,2721 ; 1524,2753 1524,3039 ; 1525,2685 1525,2686 ; 1525,2690 1525,2723 ; 1525,2751 1525,3039 ; 1526,2685 1526,2686 ; 1526,2691 1526,2726 ; 1526,2749 1526,3039 ; 1527,2685 1527,2686 ; 1527,2691 1527,2729 ; 1527,2746 1527,3039 ; 1528,2685 1528,2686 ; 1528,2692 1528,2734 ; 1528,2740 1528,3039 ; 1529,2685 1529,2686 ; 1529,2692 1529,3039 ; 1530,2685 1530,2686 ; 1530,2693 1530,3039 ; 1531,2685 1531,2686 ; 1531,2693 1531,3039 ; 1532,2685 1532,2686 ; 1532,2694 1532,3039 ; 1533,2685 1533,2686 ; 1533,2695 1533,3039 ; 1534,2685 1534,2686 ; 1534,2695 1534,3039 ; 1535,2685 1535,2686 ; 1535,2696 1535,3039 ; 1536,2685 1536,2686 ; 1536,2697 1536,3039 ; 1537,2685 1537,2686 ; 1537,2698 1537,3039 ; 1538,2685 1538,2686 ; 1538,2699 1538,3039 ; 1539,2685 1539,2686 ; 1539,2700 1539,3039 ; 1540,2685 1540,2686 ; 1540,2701 1540,3039 ; 1541,2685 1541,2686 ; 1541,2702 1541,3039 ; 1542,2685 1542,2686 ; 1542,2704 1542,3039 ; 1543,2685 1543,2686 ; 1543,2705 1543,3039 ; 1544,2685 1544,2686 ; 1544,2706 1544,3039 ; 1545,2685 1545,2686 ; 1545,2708 1545,3039 ; 1546,2685 1546,2686 ; 1546,2710 1546,3039 ; 1547,2685 1547,2686 ; 1547,2712 1547,3039 ; 1548,2685 1548,2686 ; 1548,2715 1548,3037 ; 1548,3038 1548,3039 ; 1549,2685 1549,2686 ; 1549,2718 1549,3036 ; 1549,3038 1549,3039 ; 1550,2685 1550,2718 ; 1550,2721 1550,3039 ; 1551,2685 1551,3039
  Top Layer w20: R2.2 v1(1087,3892) 1087,3899.49 1137.98,3950.46 1137.98,4049.61 1092.39,4095.21 S1.1 1172,4400.47 C5.1 ; PJ1.7 PJ1.6 ; PJ1.1 PJ1.6 ; S2.1 1494.47,1812 C6.2 1578.5,1851.5 1578.5,2228.78 1566.78,2240.5 1541,2240.5 C8.1 1493.47,2273 S3.1 1430,2422.76 1430,2685 ; 1430,2735 1430,2751 ; 1430,2775 1430,2797 ; 1430,2810 1430,2830 ; 1430,2849 1430,2867 ; 1430,2881 1430,2899 ; 1430,2918 1430,2936 ; 1430,2974 1430,2992 ; 1430,3039 v1(1430,3547) ; J2.3 J2.4 ; v1(1964,3138) 1964,3182 J2.4 ; v1(1964,3571) 2035,3571 C7.1 ; R8.2 v3@2076,1652 ; J3.7 J3.6 ; U2.13 2037,3731.01 C7.1 ; U1.1 2084.55,1656.55 v3(2078,1650) v3@2076,1652 ; R1.1 2351,3067 J1.4@2445,3161 ; J7.3 2288.5,2079 2179.5,1970 2137,1970 J3.6 ; C3.2 2509.32,1122.27 C4.2 2347.32,1139.94 C2.2 2190.94,1144 v1(2084,1144) 1976.26,1144 D2.1 1960,1133 1873,1046 1548.21,1046 C1.2 1322.29,1138.21 PJ1.6 ; v2(2785,1146) 2832,1146 L01.3 ; L08.3 2762,4099.26 2762,3863 L07.3 2776,3693 2776,3380.15 L06.3 2781,3229.15 2781,2894 L05.3 2787,2754 2787,2467 L04.3 2788,2334 2788,2040.15 L03.3 2805,1925.15 2805,1628 L02.3 2801,1526 2801,1221 L01.3 ; v2(3137,1245) 2931,1245 L01.3 ; v2(3324,1248) 3324,1279.74 L16.3 ; L09.3 3450,4324.96 3450,4035.74 L10.3 3441.96,3908 3441.96,3570.85 L11.3 3436,3457.11 3436,3095.74 L12.3 3440,2983.96 3440,2659.74 L13.3 3437,2546.96 3437,2226.89 L14.3 3445,2109.11 3445,1814.74 L15.3 3461,1672.96 3461,1379 3419.85,1337.85 L16.3 ; L24.3 3641,4145 3641,3823.04 L23.3 3644,3708.26 3644,3373.15 L22.3 3646,3259.15 3646,2887.15 L21.3 3640,2769.15 3640,2479.15 L20.3 3649,2364.15 3649,2033.15 L19.3 3636,1914.15 3636,1618.15 L18.3 3639,1489.15 3639,1223.15 L17.3 ; L25.3 4311.15,4411.85 4373,4350 4373,4004.85 L26.3 4365,3874.85 4365,3535.85 L27.3 4361,3417.85 4361,3094.85 L28.3 4362,2979.85 4362,2649.85 L29.3 4365,2530.85 4365,2246.85 L30.3 4359,2130.85 4359,1819.85 L31.3 4362,1706.85 4362,1431.85 L32.3 4391,1286.85 4391,1182.57 4289.43,1081 4073,1081 3935,1219 3760.85,1219 L17.3 ; J2.4 1826,3358 C7.1 ; v3@2076,1652 2080,1656 J3.6 ; L16.3 3559.81,1160.15 L17.3
  Top Layer w30: C3.2 2635.06,1140.94 v2(2642,1134)
  Bottom Layer w20: v1(1087,3892) 1643,3892 v1(1964,3571) 1940,3547 v1(1430,3547) ; PJ1.8 PJ1.9 1232.5,1532.5 v1(1580,1880) 1696,1996 1897,1996 J3.7 ; v1(1964,3138) 2430,3138 J1.4@2453,3161 ; v3(2078,1650) 2084,1644 v1(2084,1144) ; v2(3137,1245) 3321,1245 v2(3324,1248)
  Bottom Layer w30: v2(2642,1134) 2773,1134 v2(2785,1146)
NetC8_2: C8.2 J5.1 S3.2 | length 662.8
  Top Layer w20: J5.1 1147,2447.43 S3.2 1537.61,2206.39 C8.2
NetJ1_5: J1.5 LED1.1 | length 350.5
  Top Layer w20: LED1.1 2109,3029.5 2413.5,3029.5 J1.5@2445,3061
NetJ7_2: J7.2 R7.2 | length 113.5
  Top Layer w20: J7.2 2444,2179 R7.2
NetL01_2: L01.2 L02.4 | length 263.1
  Top Layer w20: L01.2 2854,1460.89 L02.4
NetL02_2: L02.2 L03.4 | length 247.2
  Top Layer w20: L02.2 2854,1856.04 L03.4
NetL03_2: L03.2 L04.4 | length 277.9
  Top Layer w20: L03.2 2854,2281.89 L04.4
NetL04_2: L04.2 L05.4 | length 273.1
  Top Layer w20: L04.2 2854,2702.89 L05.4
NetL05_2: L05.2 L06.4 | length 333.2
  Top Layer w20: L05.2 2854,3184.04 L06.4
NetL06_2: L06.2 L07.4 | length 320.9
  Top Layer w20: L06.2 2854,3652.89 L07.4
NetL07_2: L07.2 L08.4 | length 269.3
  Top Layer w20: L07.2 2854,4073.15 L08.4
NetL08_2: L08.2 L09.4 | length 470.6
  Top Layer w20: L08.2 2925.89,4460 3196.85,4460 L09.4
NetL09_2: L09.2 L10.4 | length 277.1
  Top Layer w20: L10.4 3382.11,4085.96 L09.2
NetL10_2: L10.2 L11.4 | length 308.9
  Top Layer w20: L11.4 3382.11,3629.11 L10.2
NetL11_2: L11.2 L12.4 | length 321.2
  Top Layer w20: L12.4 3382.11,3159.96 L11.2
NetL12_2: L12.2 L13.4 | length 292.1
  Top Layer w20: L13.4 3382.11,2719.96 L12.2
NetL13_2: L13.2 L14.4 | length 281.9
  Top Layer w20: L14.4 3382.11,2290.11 L13.2
NetL14_2: L14.2 L15.4 | length 272.2
  Top Layer w20: L15.4 3264,1857.04 L14.2
NetL15_2: L15.2 L16.4 | length 266.1
  Top Layer w20: L16.4 3382.11,1455.96 L15.2
NetL16_2: L16.2 L17.4 | length 497.3
  Top Layer w20: L16.2 3444.11,1079 3738.96,1079 L17.4
NetL17_2: L17.2 L18.4 | length 244.1
  Top Layer w20: L17.2 3702,1434.04 L18.4
NetL18_2: L18.2 L19.4 | length 280.1
  Top Layer w20: L18.2 3702,1862.04 L19.4
NetL19_2: L19.2 L20.4 | length 289.1
  Top Layer w20: L19.2 3702,2299.04 L20.4
NetL20_2: L20.2 L21.4 | length 266.1
  Top Layer w20: L20.2 3820.11,2732.11 L21.4
NetL21_2: L21.2 L22.4 | length 336.1
  Top Layer w20: L21.2 3702,3197.04 L22.4
NetL22_2: L22.2 L23.4 | length 300.2
  Top Layer w20: L22.2 3702,3648.15 L23.4
NetL23_2: L23.2 L24.4 | length 294.8
  Top Layer w20: L23.2 3820.11,4081.22 L24.4
NetL24_2: L24.2 L25.4 | length 548.2
  Top Layer w20: L24.2 3784.15,4485 4112.74,4485 L25.4
NetL25_2: L25.2 L26.4 | length 328.1
  Top Layer w20: L26.4 4304,4053.96 L25.2
NetL26_2: L26.2 L27.4 | length 313.1
  Top Layer w20: L27.4 4185.89,3620.89 L26.2
NetL27_2: L27.2 L28.4 | length 289.1
  Top Layer w20: L28.4 4185.89,3159.89 L27.2
NetL28_2: L28.2 L29.4 | length 298.1
  Top Layer w20: L29.4 4304,2709.96 L28.2
NetL29_2: L29.2 L30.4 | length 258.1
  Top Layer w20: L30.4 4185.89,2276.89 L29.2
NetL30_2: L30.2 L31.4 | length 273.1
  Top Layer w20: L31.4 4304,1882.96 L30.2
NetL31_2: L31.2 L32.4 | length 243.1
  Top Layer w20: L32.4 4304,1491.96 L31.2
NetL32_2: L32.2
NetL33_2: 
NetL34_2: 
NetL35_2: 
NetL36_2: 
NetL37_2: 
NetLED1_2: LED1.2 R1.2 | length 132.6
  Top Layer w20: LED1.2 2125,3137 R1.2
NetLED2_2: LED2.2 R2.1 | length 158.6
  Top Layer w20: LED2.2 1157,3731 R2.1
NetLED3_2: LED3.2 R8.1 | length 172.4
  Top Layer w20: LED3.2 1970,1581 R8.1
NetQ1_2: Q1.2 R3.2 | length 282.9
  Top Layer w20: Q1.2 1913,2714 v1(1946,2714) ; v1(2074,2735) 2124,2785 R3.2
  Bottom Layer w20: v1(1946,2714) 2053,2714 v1(2074,2735)
OUT_DATA: Q1.1 R5.2 R6.1 U2.2 | length 1951.9
  Top Layer w20: U2.2 1583.19,4236 1672,4236 1672,4025.43 1684,4013.43 1684,3904 1612,3832 1612,3423 1675.53,3359.47 1675.53,2980.47 Q1.1 1992,2766 R5.2 2011,2681 R6.1
OUT_RGB: J6.2 L01.4 R7.1 | length 2239.5
  Top Layer w20: v1(2202,2397) 2417,2397 2520,2294 R7.1 2520,2126 2713,1933 2713,1147 2794,1066 2906,1066 2972.11,1132.11 L01.4
  Bottom Layer w20: J6.2@2062,2170 J6.2 2202,2310 v1(2202,2397) v1@2213,2397
OUT_RGB_ARD: J5.2 J6.1 | length 1189.2
  Bottom Layer w20: J5.2 1441,2715 J6.1
OUT_RGB_CBU: J6.3 Q1.3 R4.2 R6.2 | length 804.4
  Top Layer w20: Q1.3 1810,2648 1853,2605 2005,2605 R6.2 ; J6.3 2006,2350 R6.2 ; R4.2 2076,2676 R6.2
P6: U2.10
P6_KEY1: C5.2 S1.2 U2.3 | length 525.6
  Top Layer w20: C5.2 1242,4345.65 S1.2 1404.54,4183.12 U2.3
P7: U2.9
P8: U2.8
P9: U2.19
P14: U2.1
P15: U2.21
P17: U2.20
P22: LED2.1 U2.4 | length 796.3
  Top Layer w20: LED2.1 1319,3674 1367,3722 1367,4093 1402,4128 U2.4
P24: U2.12
P26: U2.11
P28: U2.17
RST: C6.1 J2.8 S2.2 U2.18 | length 3283.7
  Top Layer w20: S2.2 1535.39,1738.39 C6.1 1855,2058 v1(1855,2544) ; U2.18 2031,4128 1997,4094 1997,3940 2042,3895 2205,3895 2226,3874 J2.8
  Bottom Layer w20: v1(1855,2544) 1855,3106.57 1997.43,3249 2155,3249 J2.8
RX2: J2.2 U2.6 | length 815.7
  Top Layer w20: U2.6 1637.24,4017.76 1654,4001 1654,3929 1574,3849 1574,3372 J2.2
TX2: J2.1 U2.7 | length 665.4
  Top Layer w20: J2.1 1526,3907.69 U2.7
WRX: J2.6 J5.7 U2.16 | length 1764.9
  Top Layer w20: v1(2103,4014) 2177.24,4014 2189.24,4026 2200.24,4015 U2.16
  Bottom Layer w20: J5.7 1921,3215 J2.6 2019,3327 2103,3411 v1(2103,4014)
WTX: J2.5 J5.8 U2.15 | length 1661.7
  Top Layer w20: v1(2052,3959) 2199.35,3959 U2.15
  Bottom Layer w20: J5.8 1443.66,3315 1488.19,3270.47 1876.47,3270.47 J2.5 2052,3446 v1(2052,3959)
pads on no net: J1.1 J1.2 J1.3 J1.6 J1.7 J1.8 J1.9 J1.10 J3.1 J3.2 J3.3 J5.3 J5.4 J5.5 J5.6 PJ1. PJ1.2 PJ1.3 PJ1.4 S1.3 S1.4 S2.3 S2.4 S3.3 S3.4

## Polygon pours and split planes (outlines as drawn)
GND on Top Layer "Top Layer-No Net" (solid, pour order 4): 1001,1106 1106,1001 1106,1000 4385,1000 4543.31,1158.31 4543.31,4421.69 4421.69,4543.31 2302.69,4543.31 2302,4544 2302,3659 2299,3656 1480,3656 1475,3661 1476,3662 1476,4541 1473.69,4543.31 1123.31,4543.31 1000,4420
GND on Bottom Layer "Top Layer-No Net" (solid, pour order 6): 1000,1125 1125,1000 4385,1000 4543.31,1158.31 4543.31,4421.69 4421.69,4543.31 2311.69,4543.31 2305,4550 2305,3656 1479,3656 1478,3657 1478,4542 1476,4544 1475.31,4543.31 1123.31,4543.31 1000,4420

## Keep-outs
Keep-Out Layer:
  lines w10: 4420,4543.31 cw(c4420.85,4420.85) 4543.31,4421.69 4543.31,1158.31 ; 4421.69,4543.31 1123.31,4543.31 ccw(c1123.31,4420) 1000,4420 1000,1125 ccw(c1125,1125) 1125,1000 4385,1000 ccw(c4381.65,1161.65) 4543.31,1165

## Silkscreen, mask and mechanical layers (free items; w line width, h text height)
Top Overlay:
  drawing of 879 lines, arcs and shapes, not listed

## Text inside footprints (layer, text, board x,y; h text height)
C1: Top Overlay "+" at 1443,1293.27 h39.37
C2: Top Overlay "+" at 2182,1295 h39.37
C3: Top Overlay "+" at 2515,1296 h39.37
U2: Top Overlay "15" at 2218.98,3892.3 h59.06; Top Overlay "14" at 2135.98,3692.3 h59.06; Top Overlay "8" at 1625.98,3692.3 h59.06; Top Overlay "7" at 1535.9,3894.51 h59.06; Top Overlay "P8" at 1702.98,3783.3 h59.06 r90; Top Overlay "P7" at 1771.98,3783.3 h59.06 r90; Top Overlay "P6" at 1840.52,3783.3 h59.06 r90; Top Overlay "P26" at 1909.34,3783.3 h59.06 r90; Top Overlay "P24" at 1978.34,3783.3 h59.06 r90; Top Overlay "1" at 1521.9,4333.51 h59.06; Top Overlay "21" at 2231.98,4338.3 h59.06; Top Overlay "P14" at 1637.98,4274.46 h59.06; Top Overlay "P16" at 1637.98,4219.4 h59.06; Top Overlay "P20" at 1637.98,4165.62 h59.06; Top Overlay "P22" at 1637.98,4111.19 h59.06; Top Overlay "ADC" at 1637.98,4056.77 h59.06; Top Overlay "RX2" at 1637.98,4002.35 h59.06; Top Overlay "TX2" at 1637.98,3947.3 h59.06; Top Overlay "VCC" at 2116.98,3783.36 h59.06 r90; Top Overlay "GND" at 2047.98,3783.3 h59.06 r90; Top Overlay "TX1" at 2052.04,3943.3 h59.06; Top Overlay "RX1" at 2052.04,3998.53 h59.06; Top Overlay "P28" at 2052.04,4054.39 h59.06; Top Overlay "CEN" at 2052.04,4109.62 h59.06; Top Overlay "P9" at 2052.04,4164.84 h59.06; Top Overlay "P17" at 2052.04,4219.44 h59.06; Top Overlay "P15" at 2052.04,4275.3 h59.06